# Altium PCB PCB1.PcbDoc
Units mil, origin at the board's own origin, x right, y up, seen from the top; angles counter-clockwise.
Board outline 6000 x 4000 mil, 2 copper layers (Top Layer, Bottom Layer); 8 components, 5 nets, 20 pads, 0 vias.
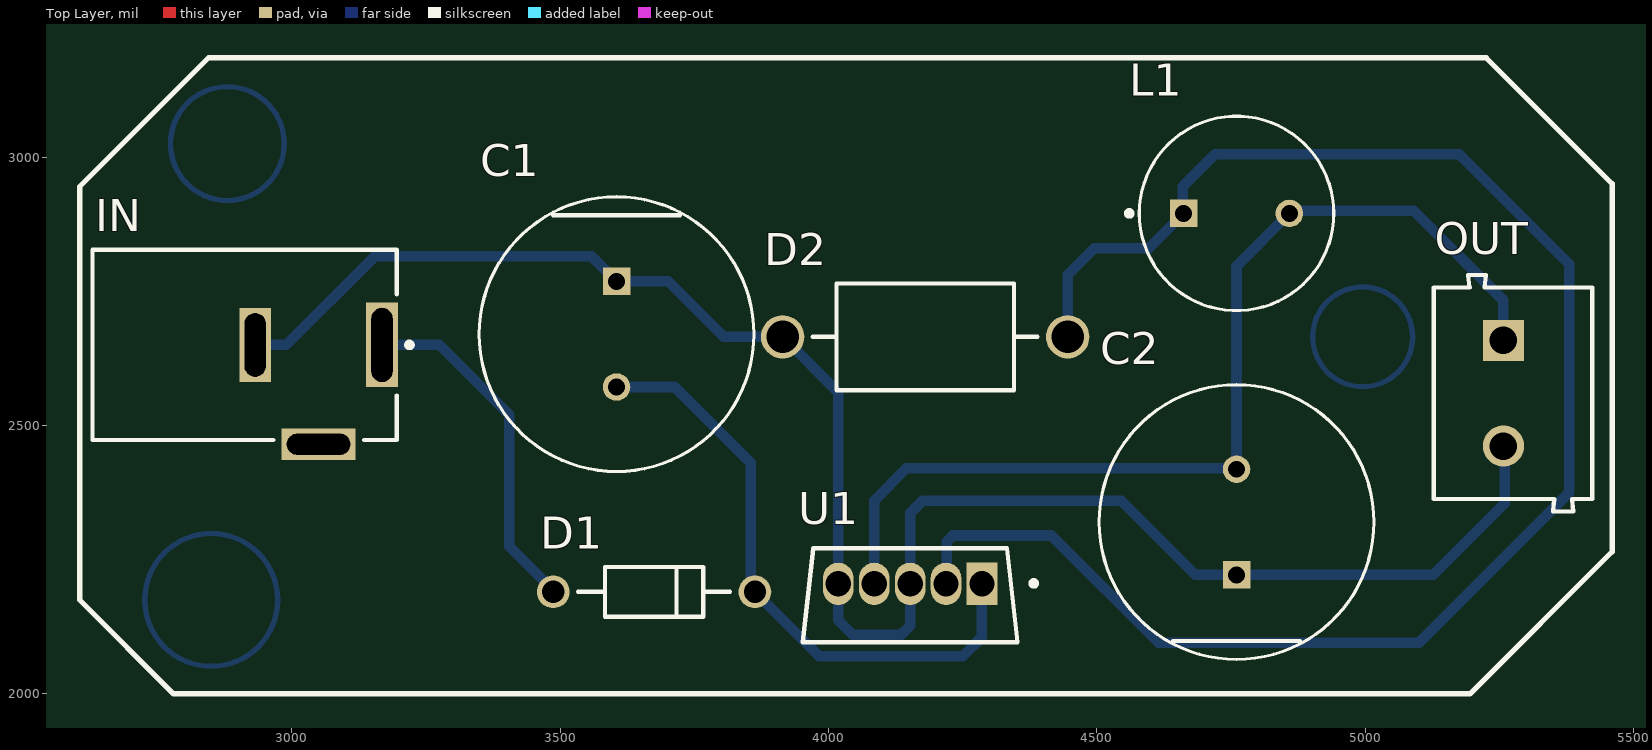
[diagram p0: Top Layer view]
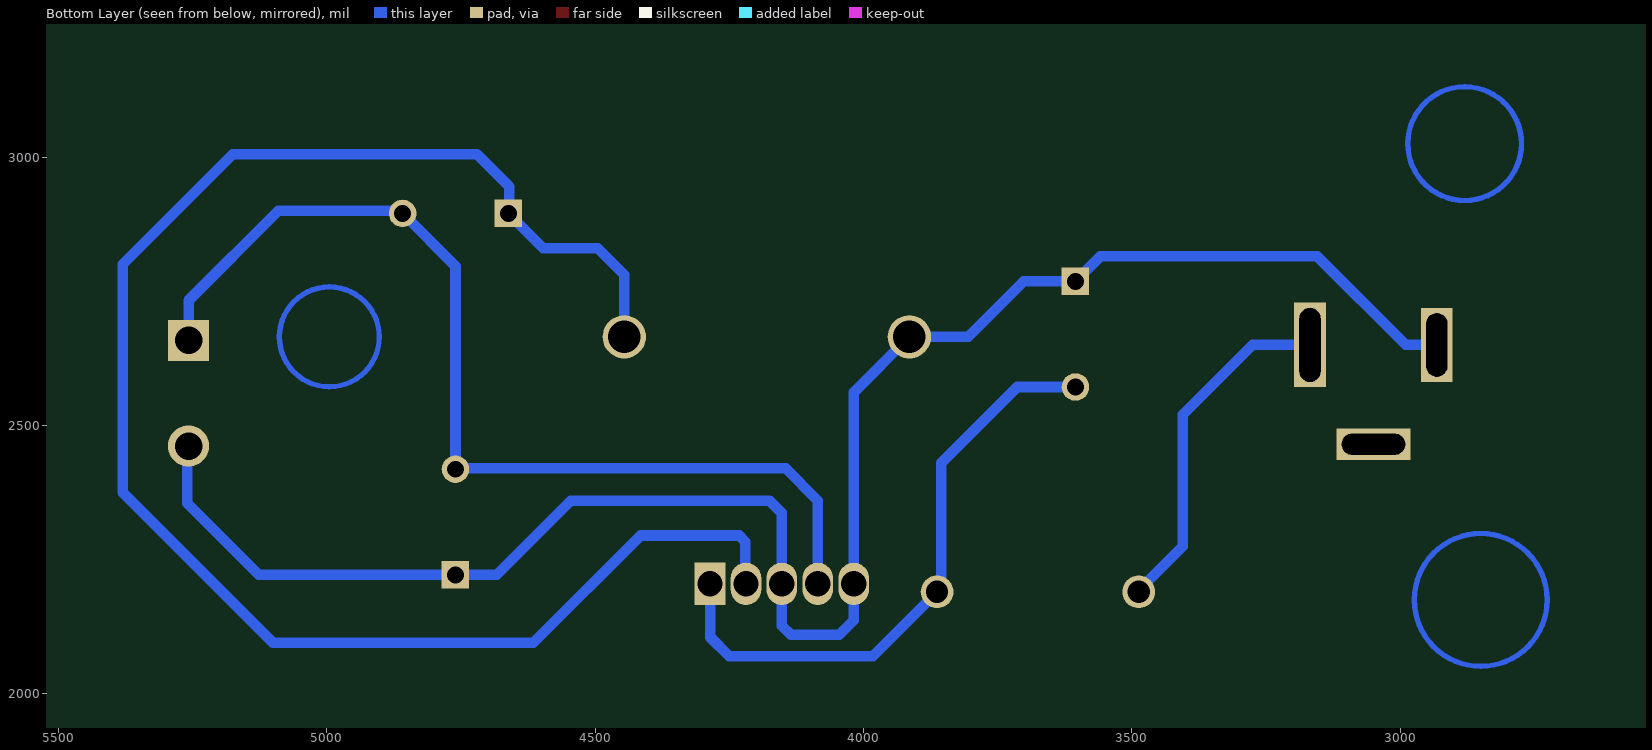
[diagram p1: Bottom Layer view, seen from below]
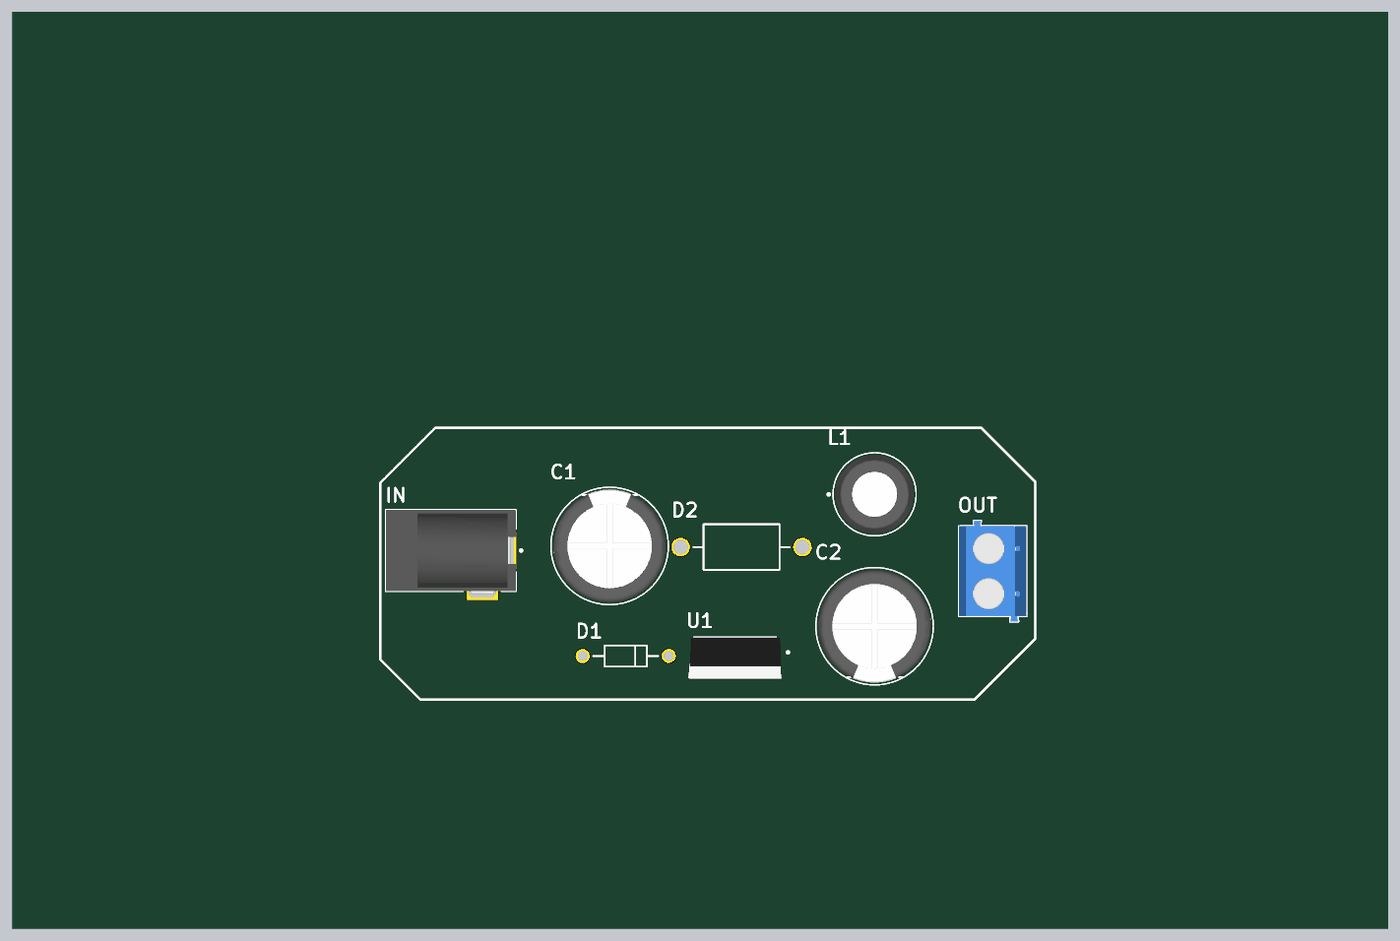
[diagram p2: 3D render of the assembled board from above, using the file's embedded part models]

## Layer stack, top to bottom
Top Solder: solder mask 0.4, Solder Resist, Dk 3.5
Top Layer: signal copper 1.4
Dielectric 1: dielectric 12.6, FR-4, Dk 4.8
Bottom Layer: signal copper 1.4
Bottom Solder: solder mask 0.4, Solder Resist, Dk 3.5

## Board outline
1000,1000 7000,1000 7000,5000 1000,5000

## Design rules (kind name [scope] priority, off if disabled: settings)
Clearance [All] p1: gap=10 ignorepadtopadclearanceinfootprint=FALSE except(0: Arc-Hole Track-Hole SMDPad-Hole THPad-Hole Via-Hole Fill-Hole Poly-Hole Region-Hole Text-Hole)
PolygonConnect [All] p1: connectstyle=Relief reliefconductorwidth=10 reliefentries=4 polygonreliefangle="90 Angle" airgapwidth=10
RoutingLayers [All] p1: top layer_v5=FALSE bottom layer_v5=TRUE
RoutingVias [All] p1: holewidth=28 width=50 viastyle="Through Hole" minholewidth=28 minwidth=50 maxholewidth=28 maxwidth=50
SolderMaskExpansion [All] p1: expansion=4 istentingtop=FALSE
Width [All] p1: maxlimit=78.74 minlimit=19.68 preferedwidth=39.37
29 further rules are at their usual default settings.

## Components (designator, comment, footprint, x,y, rotation, side; value= is the part's Value field where it differs from the comment)
C1 "100UF" FP-RAD-TH-D_12_5_0_5-L_20-MFG 3605,2670 r270 top
C2 "1000UF" FP-RAD-TH-D_12_5_0_5-L_20-MFG 4760,2320 r90 top
D1 "1N4007" ONSC-AXIAL_LEAD-2-59-10_P 3675,2190 r180 top
D2 "1N5822" ONSC-AXIAL_LEAD-2-267-05_V 4180,2665 r180 top
IN "PJ-002A" CUI-PJ-002A_V 3050,2650 r180 top
L1 "100UH" FP-RLB0914-MFG 4760,2895 r0 top
OUT "691102710002" 691102710002 5275,2560 r270 top
U1 "LM2576HVT-ADJ/NOPB" FP-KC0005A-MFG 4151.93,2183.54 r270 top

## Footprints (in the part's own frame and the unit in brackets; to place one, negate y for a bottom-side part, rotate by r counter-clockwise, add the part's x,y. Pads: shape width x height; smd on the part's side, far side on the other; paste and mask are expansions set on the pad)
691102710002 [mm] "5,00mm - modular - blue - Horizontal entry with pressure clamp - 9,9 mm height - 02p"
  rect 1.95x1.95 hole 1.3: 1(-2.5,-0.45)
  round 1.95 hole 1.3: 2(2.5,-0.45)
  silkscreen extent -5.6,-3.75 5.6,3.75, body extent -5.6,-3.75 5.6,3.75, height 9.96
CUI-PJ-002A_V [mm] "THD, 3-Leads, Body 14.4x9mm, Height 11mm"
  rect 1.5x4 hole 1 slot 3.5 at 90 deg: 1(-3,0)
  rect 1.5x3.5 hole 1 slot 3 at 90 deg: 2(3,0)
  rect 3.5x1.5 hole 1 slot 3 at 0 deg: 3(0,4.7)
  silkscreen extent -4.43,-4.5 10.7,4.5, body extent -3.7,-4.5 10.7,4.9, height 11
FP-KC0005A-MFG [mm]
  rect 2x1.45 hole 1.2 paste-1000 mask+0: 1(-0.545,3.4)
  rrect100% 2x1.45 hole 1.2 paste-1000 mask+0: 2(-0.545,1.7) 3(-0.545,0) 4(-0.545,-1.7) 5(-0.545,-3.4)
  silkscreen extent -2.22,-5.08 2.22,5.98, body extent -2.51,-5.44 2.51,5.44, height 0.25
FP-RAD-TH-D_12_5_0_5-L_20-MFG [mm]
  rect 1.3x1.3 hole 0.8 paste-1000 mask+0: 1(-2.5,0)
  round 1.3 hole 0.8 paste-1000 mask+0: 2(2.5,0)
  silkscreen extent -6.5,-6.5 6.5,6.5, body extent -6.6,-6.6 6.6,6.6, height 0.25
FP-RLB0914-MFG [mm]
  rect 1.3x1.3 hole 0.8 paste-1000 mask+0: 1(-2.5,0)
  round 1.3 hole 0.8 paste-1000 mask+0: 2(2.5,0)
  silkscreen extent -5.2,-4.6 4.6,4.6, body extent -4.7,-4.7 4.7,4.7, height 0.25
ONSC-AXIAL_LEAD-2-59-10_P [mm] "AXIAL, 2-Leads, Diameter 2.35mm"
  round 1.55 hole 1.05: 1(-4.77,0) 2(4.77,0)
  silkscreen extent -3.59,-1.17 3.59,1.17
ONSC-AXIAL_LEAD-2-267-05_V [mm] "AXIAL, 2-Leads, Diameter 5.05mm"
  round 2.05 hole 1.55: 1(-6.745,0) 2(6.745,0)
  silkscreen extent -5.32,-2.52 5.32,2.52

## Part data
C1 C2: library part CMP-05427-001016-1, "Aluminum Electrolytic Capacitors (Radial Lead Type) 1000uF ±20% 25V", Capacitance=1mF, Case/Package=Radial, Leakage Current=250uA, Max Operating Temperature=105°C, Min Operating Temperature=-40°C, Package Quantity=200, Ripple Current=498mA, Tolerance=20%, Voltage=25V, Construction=RADIAL, Diameter=12.5mm, Dissipation Factor=0.22%, Height=20mm, Height - Seated (Max)=0.787inch, Lead Diameter=0.6mm, Lead Free="Lead Free", Lead Pitch=5mm, Lead/Base Style=Straight, Length=20mm, Life (Hours)=10000Hour, Mount="Through Hole", Number of Pins=2, Packaging=Bulk, Radiation Hardening=No, REACH SVHC="No SVHC", RoHS Compliant=Yes, Series=EB, Termination=Radial, Voltage Rating=25V, Voltage Rating (DC)=25V
D1: library part CMP-0902-00142-1, "Standard Recovery Rectifier, 2-Pin Axial_Lead, Pb-Free, Bulk Bag", Manufacturer="On Semiconductor", ComponentLink1Description="Manufacturer URL", ComponentLink1URL=http://www.onsemi.com/, ComponentLink2Description=Datasheet, ComponentLink2URL=http://www.onsemi.com/pub_link/Collateral/1N4001-D.PDF, ComponentLink3Description="Package Specification", ComponentLink3URL=http://www.onsemi.cn/pub_link/Collateral/59-10.PDF, DatasheetVersion="Rev. 13", IFSM Max (A)=30, IO(rec) Max (A)=1, Mounting Technology="Through Hole", PackageDescription="2-Pin, Axial Lead, Diameter 2.35 mm", PackageReference=AXIAL_LEAD-2-59-10, PackageVersion="Rev. U, 02/2005", Packing="Bulk Bag", PartNumber=1N4007, RoHS=TRUE, Type="Standard Recovery", VRRM Max (V)=1000
D2: library part CMP-1055-00007-1, "Rectifier, 2-Pin Axial_Lead, Bulk Bag", Manufacturer="On Semiconductor", ComponentLink1Description="Manufacturer URL", ComponentLink1URL=http://www.onsemi.com/, ComponentLink2Description=Datasheet, ComponentLink2URL=http://www.onsemi.cn/pub_link/Collateral/1N5820-D.PDF, ComponentLink3Description="Package Specification", ComponentLink3URL=http://www.onsemi.com/pub_link/Collateral/267-05.PDF, Configuration=Single, DatasheetVersion="Rev. 10", IFSM Max (A)=80, Mounting Technology="Through Hole", Note1=0, PackageDescription="2-Pin, Axial Lead, Diameter 5.05 mm", PackageReference=AXIAL_LEAD-2-267-05, PackageVersion="Rev. G, 06/2000", Packing="Bulk Bag", PartNumber=1N5822, RoHS=FALSE
IN: library part CMP-2000-06895-2, "Through Hole Right Angle DC Power Jack, 2.5 A, 2 mm Center Pin, 3 Position, -25 to 85 degC, RoHS, Bulk", Current Rating=2.5A, Flammability Rating=UL94V-0, Insulation Resistance=50MOhms, Manufacturer=CUIInc., Operating Temperature Range=-25Cto+85C, Package Description="3-Pin Through Hole Device, Body 14.4 x 9 mm, Height 11 mm", Voltage Rating=24V, Brand=CUI, Connector Type=DCPowerJack, Contact Gender=Male, Contact Material=Copper, Contact Plating=Nickel, Datasheet URL=http://www.cui.com/product/resource/pj-002a.pdf, Datasheet Version="Rev. 1.03, 04/2016", Factory Pack Quantity=500, Housing Material=PolybutyleneTerephthalate(PBT), Inside Contact Diameter=2mm, Manufacturer URL=http://www.cui.com/, Mounting Angle=Right, Mounting Style=ThroughHole, Mounting Technology=ThroughHole, Outside Contact Diameter=6.5mm, Package Reference=PJ-002A, Product=Jacks, Product Category=DCPowerConnectors, RoHS=True, Termination Style=ThroughHole
L1: library part CMP-07248-000080-1, "FIXED IND 100UH 1A 280 MOHM TH", Case/Package=Radial, Current Rating=1A, DC Resistance (DCR)=280mR, Inductance=100uH, Inductance Tolerance=10%, Max Operating Temperature=105°C, Min Operating Temperature=-20°C, Package Quantity=200, Resistor Type=Wirewound, Self Resonant Frequency=3.5MHz, Test Frequency=796kHz, Core Material=Ferrite, DC Current=1A, Diameter=8.7mm, Height=12mm, Height - Seated (Max)=0.512inch, Lead Diameter=0.65mm, Lead Pitch=5mm, Lead/Base Style=Radial, Length=12mm, Material=Steel, Max DC Current=1A, Military Standard=Not, Mount="Through Hole", Orientation=Vertical, Packaging=Bulk, Q Factor=30, Radiation Hardening=No, REACH SVHC="No SVHC", Resistance=280mR, RMS Current (Irms)=1A, Series=RLB, Shielding=Unshielded, Termination=Radial, Tolerance=10%
OUT: library part CMP-1502-03258-1, "Series 102 - 5.00 mm Horizontal Entry Modular with Pressure Clamp WR-TBL, 2 pin", Manufacturer="Wurth Elektronik", Operating Temperature=-40to105degC, Datasheet URL=http://katalog.we-online.de/em/datasheet/6911027100xx.pdf, Manufacturer URL=http://www.we-online.de, Mounting Technology=THT, Package Reference=691102710002, Packaging=Box, Part Number=691102710002, Pin Number=2, Pitch=5.00mm, Publisher=WurthElektronik
U1: library part CMP-0069-01993-4, "IC REG BUCK ADJ 3A TO220-5", Manufacturer="Texas Instruments", Max Junction Temp=+150°C, Max Supply Voltage=60V, Nominal Supply Current=5-50uA, Output Current=3A, Output Voltage=57V, Package=KC0005A, Switching Frequency=52kHz, Temperature="-40°C to +125°C", Temperature Range High=+125°C, Temperature Range Low=-40°C, Automotive=No, Category=IC, ComponentLink2Description=Datasheet, ComponentLink2URL=http://www.ti.com/lit/ds/symlink/lm2576hv.pdf, Device Class L1="Integrated Circuits (ICs)", Device Class L2="Power Management ICs", Device Class L3="Voltage Regulators - Switching", Digikey Description="IC REG BUCK ADJ 3A TO220-5", Height=16.51mm, Lead Free=Yes, Manufacturer Part Number=LM2576HVT-ADJ/NOPB, Max Duty Cycle=98%, Mouser Description="Switching Voltage Regulators 3A STEP-DOWN VLTG REG", Number Of Outputs=1, Octopart=https://octopart.com/lm2576hvt-adj%2Fnopb-texas+instruments-24812812, Output Type=AdjustableProgrammable, RoHS=TRUE, Switching Topology=Buck

## Nets (pads, with @x,y where several pads share a name; then routed paths per layer and width w, separated by ;. In a path a pad name is that pad's centre, name@x,y a point inside that pad or via, vN(x,y) a via of type N, cw(c..) or ccw(c..) an arc to the next point about the centre after c; other vN are vias at no path point)
GND: C1.1 C2.1 D2.2 IN.2 OUT.2 U1.3 U1.5 | length 3384
  Bottom Layer w19.68: IN.2 2990,2650 3155,2815 3558.43,2815 C1.1 3701.57,2768.43 3805,2665 D2.2 4018.07,2561.38 U1.5 4018.07,2136.93 4045,2110 4135,2110 4151.93,2126.93 U1.3 4151.93,2336.93 4175,2360 4545,2360 4683.43,2221.57 C2.1 5126.57,2221.57 5260,2355 5260,2458.86 OUT.2
NetC1_2: C1.2 D1.1 U1.1 | length 1154.5
  Bottom Layer w19.68: C1.2@3610,2566.57 C1.2 3713.43,2571.57 3855,2430 3855,2197.8 D1.1 3982.8,2070 4250,2070 4285.79,2105.79 U1.1 U1.1@4279.57,2198.78
NetC2_2: C2.2 L1.2 OUT.1 U1.4 | length 1917.4
  Bottom Layer w19.68: U1.4 4085,2360 4145,2420 4758.43,2420 C2.2 4760,2796.57 L1.2 4863.43,2900 5090,2900 5257.28,2732.72 OUT.1
NetD1_2: D1.2 IN.1 | length 654.8
  Bottom Layer w19.68: IN.1 3275,2650 3405,2520 3405,2275 3487.2,2192.8 D1.2
NetD2_1: D2.1 L1.1 U1.2 | length 3148.2
  Bottom Layer w19.68: U1.2@4215,2205 U1.2@4220,2210 ; U1.2 4225,2211.14 4225,2215 U1.2@4220,2210 ; D2.1 4445.55,2780.55 4495,2830 4596.57,2830 L1.1 4660,2896.57 4660,2945 4720,3005 5175,3005 5380,2800 5380,2375 5100,2095 4615,2095 4415,2295 4231.53,2295 4220,2283.47 U1.2@4220,2210
pads on no net: IN.3
copper on no net: | length 2027.9
  Bottom Layer w10: 2973.79,2175 ccw(c2850,2175) 2973.79,2175 ; 2985.95,3025 ccw(c2880,3025) 2985.95,3025 ; 5088.01,2665 ccw(c4995,2665) 5088.01,2665

## Silkscreen, mask and mechanical layers (free items; w line width, h text height)
Top Overlay:
  lines w10: 2605,2175 2605,2935 2605,2945 2845,3185 2865,3185 5225,3185 5460,2950 5460,2265 5195,2000 2780,2000 2605,2175